# Altium PCB STM32ComputeModulePCB.PCBDOC
Units mil, origin at the board's own origin, x right, y up, seen from the top; angles counter-clockwise.
Board outline 2661.42 x 1181.1 mil, 2 copper layers (TopLayer, BottomLayer), stack 38.4 mil thick; 31 components, 119 nets, 379 pads, 65 vias.
Unrouted connection lines stored in the file: 33.
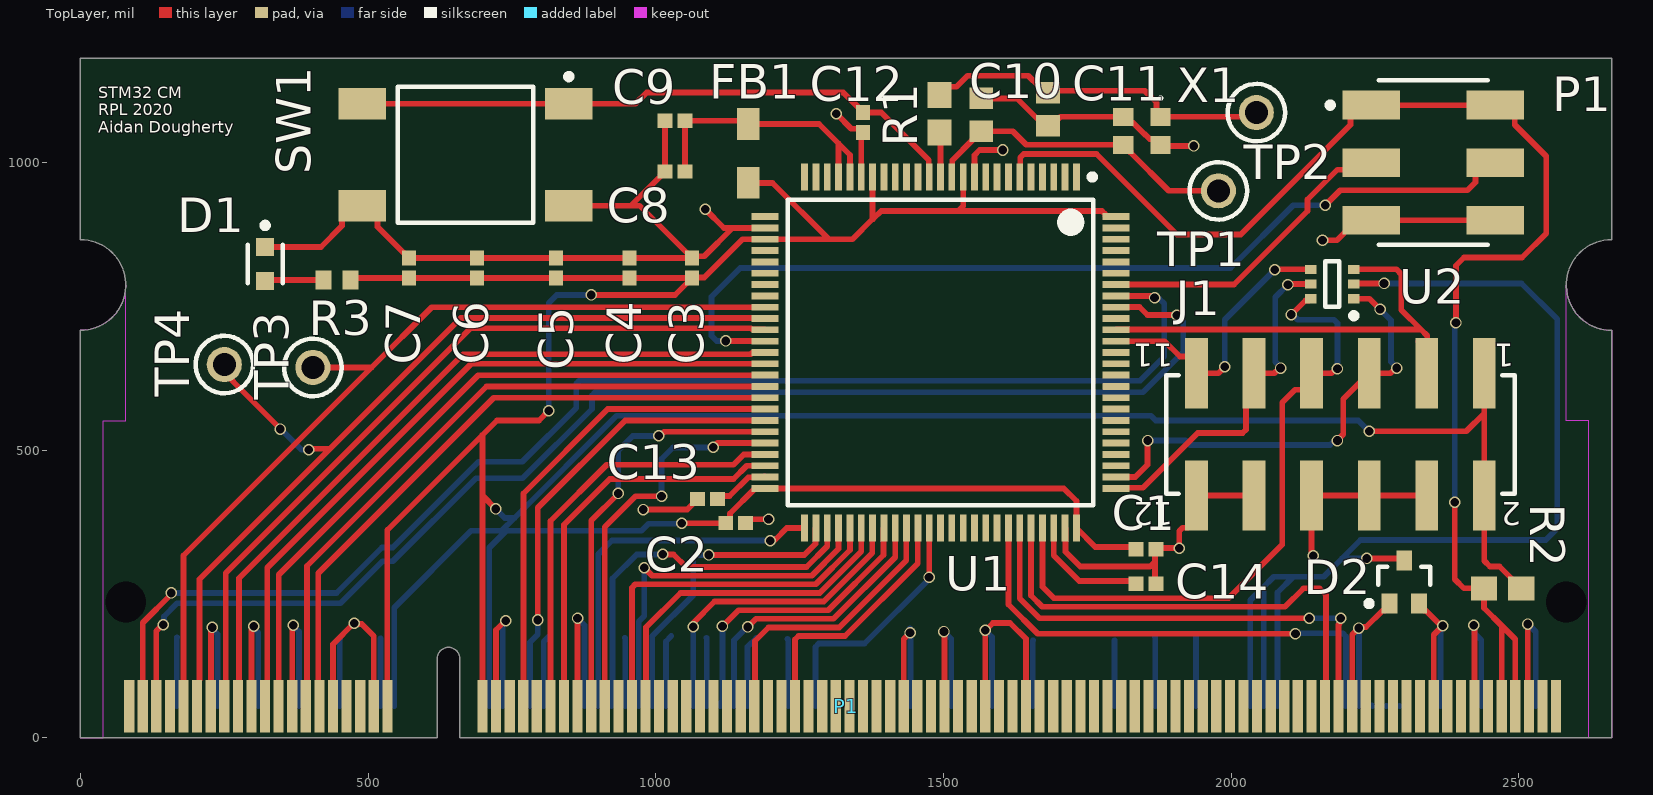
[diagram p0: TopLayer view]
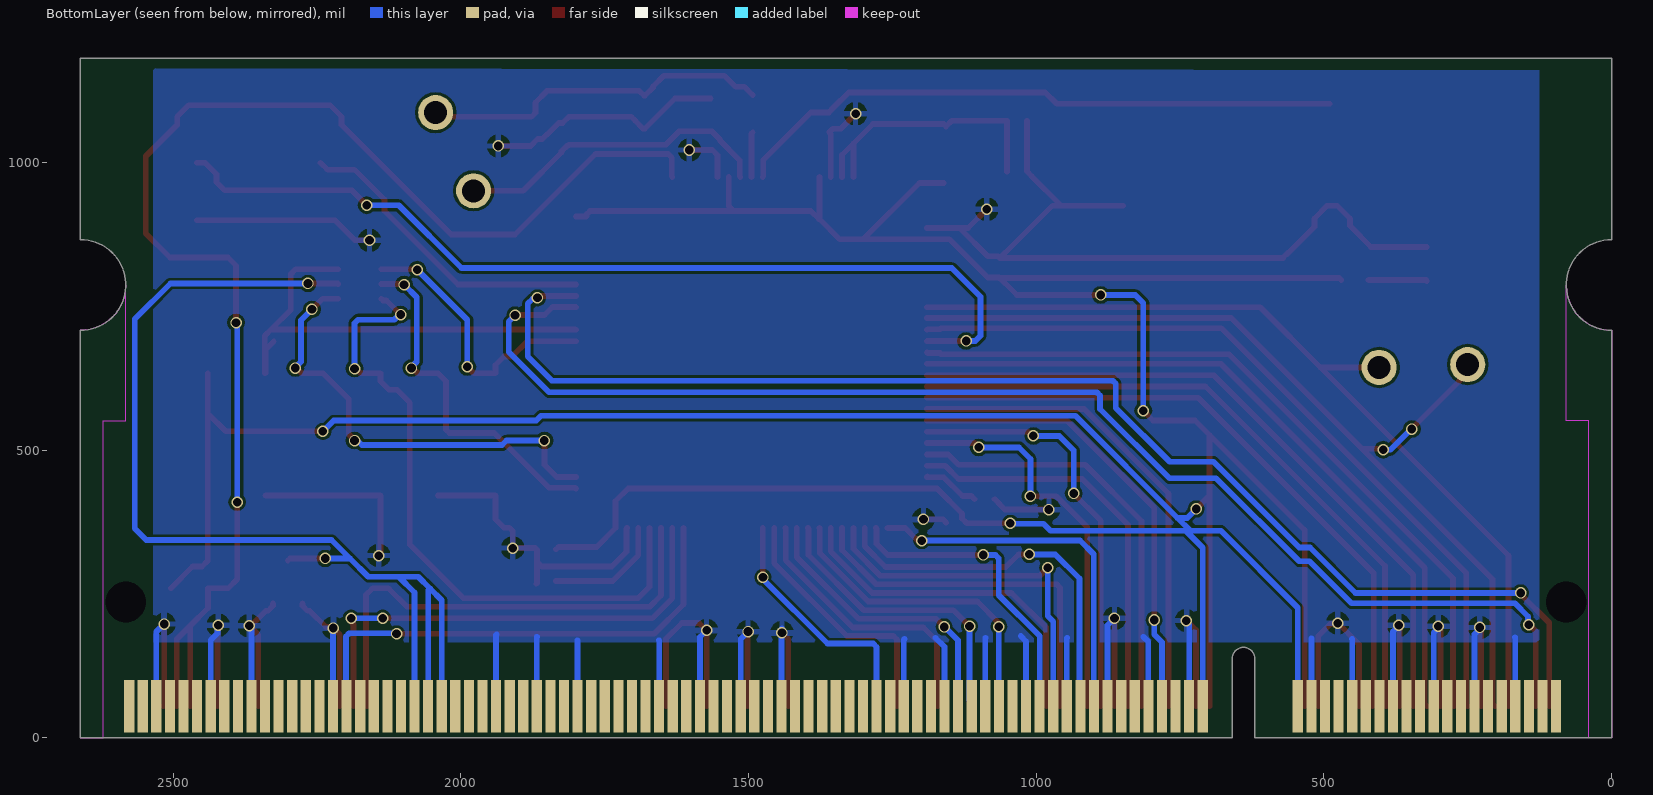
[diagram p1: BottomLayer view, seen from below]

## Layer stack, top to bottom
TopSolder: solder mask 0.4, Solder Resist, Dk 3.5
TopLayer: signal copper 0.7
Dielectric2: prepreg 37, FR-4, Dk 4.8
BottomLayer: signal copper 0.7
BottomSolder: solder mask 0.4, Solder Resist, Dk 3.5

## Board outline
0,0 0,708.66 ccw(c0,787.4) 0,866.14 0,1181.1 2661.42,1181.1 2661.42,866.14 ccw(c2661.42,787.4) 2661.42,708.66 2661.42,0 659.45,0 659.45,137.8 ccw(c639.76,137.8) 620.08,137.8 620.08,0

## Design rules (kind name [scope] priority, off if disabled: settings)
Clearance Clearance_EdgeConnector [InComponentClass('Edge Connector') vs InComponentClass('Edge Connector')] p1: gap=5.91 ignorepadtopadclearanceinfootprint=FALSE except(0: Arc-Hole Track-Hole SMDPad-Hole THPad-Hole Via-Hole Fill-Hole Poly-Hole Region-Hole Text-Hole)
Clearance [All] p2: gap=5 ignorepadtopadclearanceinfootprint=FALSE except(1: Via-Via Via-Hole)
FabricationTestPointUsage TestPointUsage [All] p1: valid=0 allowmultiple=FALSE
FabricationTestpoint Testpoint [All] p1: side=3 testpointundercomponent=TRUE minsize=40 maxsize=100 preferedsize=60 minholesize=20 maxholesize=40 preferedholesize=32 testpointgrid=1 allowsidetop=TRUE allowsidebottom=TRUE usegrid=TRUE gridtolerance=0.01
Height "MO-224 Page 3, \"Component Height Constraint\"" [TouchesRoom('JEDEC Component Area Front') Or TouchesRoom('JEDEC Component Area Back')] p1: minheight=0 maxheight=55.12 prefheight=55.12
PlaneClearance [All] p1: clearance=19.68
PolygonConnect [All] p1: connectstyle=Relief reliefconductorwidth=10 reliefentries=4 polygonreliefangle="90 Angle" airgapwidth=10
RoutingVias [All] p1: holewidth=15 width=20 viastyle="Through Hole" minholewidth=7 minwidth=10 maxholewidth=15 maxwidth=20
SilkToSolderMaskClearance SilkscreenOverComponentPads [IsPad] p1: minsilkscreentomaskgap=10 clearancetoexposedcopper=TRUE
SolderMaskExpansion [All] p1: expansion=4 istentingtop=FALSE
Width [All] p1: maxlimit=10 minlimit=10 preferedwidth=10
25 further rules are at their usual default settings.

## Classes and differential pairs
net class HDMI_DP[0..2]: HDMI_DP0 HDMI_DP1 HDMI_DP2
net class HDMI_DN[0..2]: HDMI_DN0 HDMI_DN1 HDMI_DN2
net class GPIO[0..45]: GPIO0 GPIO1 GPIO2 GPIO3 GPIO4 GPIO5 GPIO6 GPIO7 GPIO8 GPIO9 GPIO10 GPIO11 GPIO12 GPIO13 GPIO14 GPIO15 GPIO16 GPIO17 GPIO18 GPIO19 GPIO20 GPIO21 GPIO22 GPIO23 GPIO24 GPIO25 GPIO26 GPIO27 GPIO28 GPIO29 GPIO30 GPIO31 GPIO32 GPIO33 GPIO34 GPIO35 GPIO36 GPIO37 GPIO38 GPIO39 GPIO40 GPIO41 GPIO42 GPIO43 GPIO44 GPIO45
net class DSI1_DP[0..3]: DSI1_DP0 DSI1_DP1 DSI1_DP2 DSI1_DP3
net class DSI1_DN[0..3]: DSI1_DN0 DSI1_DN1 DSI1_DN2 DSI1_DN3
net class DSI0_DP[0..1]: DSI0_DP0 DSI0_DP1
net class DSI0_DN[0..1]: DSI0_DN0 DSI0_DN1
net class CAM1_DP[0..3]: CAM1_DP0 CAM1_DP1 CAM1_DP2 CAM1_DP3
net class CAM1_DN[0..3]: CAM1_DN0 CAM1_DN1 CAM1_DN2 CAM1_DN3
net class CAM0_DP[0..1]: CAM0_DP0 CAM0_DP1
net class CAM0_DN[0..1]: CAM0_DN0 CAM0_DN1
component class U_CON_SODIMM_200PIN_MO-224_NEW.SchDoc: P1

## Components (designator, comment, footprint, x,y, rotation, side; value= is the part's Value field where it differs from the comment)
C1 "100nF 0402" CAPC1005X55X25NL05T10 1852,328 r0 top
C2 "100nF 0402" CAPC1005X55X25NL05T10 1139,374 r0 top
C3 "100nF 0402" CAPC1005X55X25NL05T10 1062.99,816.93 r90 top
C4 "100nF 0402" CAPC1005X55X25NL05T10 954.72,816.93 r90 top
C5 "100nF 0402" CAPC1005X55X25NL05T10 826.77,816.93 r90 top
C6 "100nF 0402 x6" CAPC1005X55X25NL05T10 688.98,816.93 r90 top
C7 "4.7uF 0402" CAPC1005X55X25NL05T10 570.87,816.93 r90 top
C8 "10nF 0402" CAPC1005X55X25NL05T10 1033.46,984.25 r0 top
C9 "1uF 0402" CAPC1005X55X25NL05T10 1033.46,1072.83 r0 top
C10 "22pF 0603" CAPC1608X90X35ML10T15 1566,1083 r90 top
C11 "22pF 0603" CAPC1608X90X35ML10T15 1682,1093 r90 top
C12 "0.1pF 0402" CAPC1005X55X25NL05T10 1360,1070 r90 top
C13 "2.2uF 0402" CAPC1005X55X25NL05T10 1090,415 r0 top
C14 "2.2uF 0402" CAPC1005X55X25NL05T10 1852,268 r180 top
D1 "HSMG-C191" FP-HSMG-C191-MFG 321,824 r270 top
D2 "SP1001-02JTG" LFUS-SC70-3_V 2301,271 r90 top
FB1 "BLM21AG102SN1D" MURA-BLM21-H1-CHIP-2_V 1161,1016 r90 top
J1 "61031221121" 61031221121 2190,527.7 r180 top
P1 "95278-101A06LF" AMPM-95278-101A06LF_V 2351.48,1000 r270 top
P1 "SODIMM-CN-2P-M-R200" SODIMM-GF-2D-600-1K-S200 84.65,55.12 r0 top locked
R1 "0R 0603" RESC1609X55X30ML10T20 1493,1085 r90 top
R2 "0R 0603" RESC1609X55X30ML10T20 2472,260 r180 top
R3 "CRCW0603120RFKEA" RESC1609X50X30LL8T20 446,796 r180 top
SW1 "4-1437565-1" TECO-4-1437565-1_V 669.29,1013.78 r270 top
TP1 "5004" KSTN-5004 1978,951 r0 top
TP2 "5004" KSTN-5004 2044,1087 r0 top
TP3 "5004" KSTN-5004 404,644 r0 top
TP4 "5004" KSTN-5004 250,649 r0 top
U1 "STM32F427VI" STM-LQFP100_V 1495,670 r270 top
U2 "SMF05CT1G" ONSC-SC70-6-419B-02_W_V 2176,789 r180 top
X1 "ABM10-16.000MHZ-E20-T" ABRA-ABM10_V 1845,1055 r270 top

## Footprints (in the part's own frame and the unit in brackets; to place one, negate y for a bottom-side part, rotate by r counter-clockwise, add the part's x,y. Pads: shape width x height; smd on the part's side, far side on the other; paste and mask are expansions set on the pad)
61031221121 [mm] "Pin Header, pitch 2.54 mm, SMD, Vertical, dual row, 12p"
  rect 1x3.1 smd: 1(-6.35,-2.7) 2(-6.35,2.7) 3(-3.81,-2.7) 4(-3.81,2.7) 5(-1.27,-2.7) 6(-1.27,2.7) 7(1.27,-2.7) 8(1.27,2.7) 9(3.81,-2.7) 10(3.81,2.7) 11(6.35,-2.7) 12(6.35,2.7)
  silkscreen extent -7.7,-2.62 7.7,2.62, body extent -7.62,-3.75 7.62,3.75, height 9.62
ABRA-ABM10_V [mm] "SMD, 4-Leads, Body 2x2.5mm, Pitch 1.65mm"
  rect 0.8x0.9 smd: 1(-0.625,0.825) 2(-0.625,-0.825) 3(0.625,-0.825) 4(0.625,0.825)
  silkscreen extent -1.51,0.76 -1.39,0.89, body extent -1,-1.25 1,1.25, height 0.7
AMPM-95278-101A06LF_V [mm] "SMD, 6-Leads, Body 7.26x4.83mm, Pitch 2.54mm"
  rect 1.27x2.54 smd: 1(-2.54,-2.73) 2(-2.54,2.73) 3(0,-2.73) 4(0,2.73) 5(2.54,-2.73) 6(2.54,2.73)
  silkscreen extent -3.63,-4.67 3.63,2.41, body extent -3.61,-3.64 3.61,3.64, height 9.71
CAPC1005X55X25NL05T10 [mm] "Chip Capacitor, 2-Leads, Body 1.00x0.50mm, IPC Medium Density"
  rect 0.66x0.62 smd: 1(-0.44,0) 2(0.44,0)
  body extent -0.53,-0.28 0.53,0.27, height 0.55
CAPC1608X90X35ML10T15 [mm] "Chip Capacitor, 2-Leads, Body 1.7x0.9mm, IPC Low Density"
  rect 0.95x1.05 smd: 1(-0.725,0) 2(0.725,0)
  body extent -0.85,-0.45 0.85,0.45, height 0.9
FP-HSMG-C191-MFG [mm]
  rect 0.8x0.8 smd paste+0 mask+0: 1(-0.75,0) 2(0.75,0)
  silkscreen extent -1.82,-0.77 0.85,0.77, body extent -1.25,-0.55 1.25,0.55, height 0.25
KSTN-5004 [mm] "Test Point, Through Hole, Dia 2.54mm"
  round 1.55 hole 1.016: 1(0,0)
  silkscreen extent -1.27,-1.27 1.27,1.27, body extent -1.27,-1.27 1.27,1.27, height 4.57
LFUS-SC70-3_V [mm] "SOT23, 3-Leads, Body 2.25x1.35mm, Pitch 0.65mm"
  rect 0.9x0.7 smd: 1(-0.95,0.65) 2(-0.95,-0.65) 3(0.95,0)
  silkscreen extent -1.07,-1.15 0.67,1.67, body extent -1.2,-1.12 1.2,1.12, height 1.1
MURA-BLM21-H1-CHIP-2_V [mm] "Chip Ferrite Bead, 2-Leads, Body 2x1.25mm, Height 1.05mm"
  rect 1.4x1 smd: 1(-1.3,0) 2(1.3,0)
  body extent -1,-0.63 1,0.63, height 1.05
ONSC-SC70-6-419B-02_W_V [mm] "SOT23, 6-Leads, Body 2x1.25mm, Pitch 0.65mm"
  rect 0.5x0.4 smd: 1(-0.95,0.65) 2(-0.95,0) 3(-0.95,-0.65) 4(0.95,-0.65) 5(0.95,0) 6(0.95,0.65)
  silkscreen extent -1.08,-1 0.3,1.52, body extent -0.63,-1 0.63,1, height 1.1
RESC1609X50X30LL8T20 [mm] "Chip Resistor, 2-Leads, Body 1.65x0.95mm, IPC High Density"
  rect 0.7x0.85 smd: 1(-0.6,0) 2(0.6,0)
  body extent -0.82,-0.48 0.82,0.48, height 0.5
RESC1609X55X30ML10T20 [mm] "Chip Resistor, 2-Leads, Body 1.60x0.85mm, IPC Low Density"
  rect 1.15x1.05 smd: 1(-0.825,0) 2(0.825,0)
  body extent -0.85,-0.48 0.85,0.48, height 0.55
SODIMM-GF-2D-600-1K-S200 [mm] "Golden finger, SODIMM, Dual, Staggered, Pitch 0.6mm, 200-Position"
  rect 0.45x2.3 smd paste-0.75 mask+0.3: 1(0,0) 3(0.6,0) 5(1.2,0) 7(1.8,0) 9(2.4,0) 11(3,0) 13(3.6,0) 15(4.2,0) 17(4.8,0) 19(5.4,0) 21(6,0) 23(6.6,0) 25(7.2,0) 27(7.8,0) 29(8.4,0) 31(9,0) 33(9.6,0) 35(10.2,0) 37(10.8,0) 39(11.4,0) 41(15.6,0) 43(16.2,0) 45(16.8,0) 47(17.4,0) 49(18,0) 51(18.6,0) 53(19.2,0) 55(19.8,0) 57(20.4,0) 59(21,0) 61(21.6,0) 63(22.2,0) 65(22.8,0) 67(23.4,0) 69(24,0) 71(24.6,0) 73(25.2,0) 75(25.8,0) 77(26.4,0) 79(27,0) 81(27.6,0) 83(28.2,0) 85(28.8,0) 87(29.4,0) 89(30,0) 91(30.6,0) 93(31.2,0) 95(31.8,0) 97(32.4,0) 99(33,0) 101(33.6,0) 103(34.2,0) 105(34.8,0) 107(35.4,0) 109(36,0) 111(36.6,0) 113(37.2,0) 115(37.8,0) 117(38.4,0) 119(39,0) 121(39.6,0) 123(40.2,0) 125(40.8,0) 127(41.4,0) 129(42,0) 131(42.6,0) 133(43.2,0) 135(43.8,0) 137(44.4,0) 139(45,0) 141(45.6,0) 143(46.2,0) 145(46.8,0) 147(47.4,0) 149(48,0) 151(48.6,0) 153(49.2,0) 155(49.8,0) 157(50.4,0) 159(51,0) 161(51.6,0) 163(52.2,0) 165(52.8,0) 167(53.4,0) 169(54,0) 171(54.6,0) 173(55.2,0) 175(55.8,0) 177(56.4,0) 179(57,0) 181(57.6,0) 183(58.2,0) 185(58.8,0) 187(59.4,0) 189(60,0) 191(60.6,0) 193(61.2,0) 195(61.8,0) 197(62.4,0) 199(63,0)
  rect 0.45x2.3 smd far side paste-0.75 mask+0.3: 2(0.3,0) 4(0.9,0) 6(1.5,0) 8(2.1,0) 10(2.7,0) 12(3.3,0) 14(3.9,0) 16(4.5,0) 18(5.1,0) 20(5.7,0) 22(6.3,0) 24(6.9,0) 26(7.5,0) 28(8.1,0) 30(8.7,0) 32(9.3,0) 34(9.9,0) 36(10.5,0) 38(11.1,0) 40(11.7,0) 42(15.9,0) 44(16.5,0) 46(17.1,0) 48(17.7,0) 50(18.3,0) 52(18.9,0) 54(19.5,0) 56(20.1,0) 58(20.7,0) 60(21.3,0) 62(21.9,0) 64(22.5,0) 66(23.1,0) 68(23.7,0) 70(24.3,0) 72(24.9,0) 74(25.5,0) 76(26.1,0) 78(26.7,0) 80(27.3,0) 82(27.9,0) 84(28.5,0) 86(29.1,0) 88(29.7,0) 90(30.3,0) 92(30.9,0) 94(31.5,0) 96(32.1,0) 98(32.7,0) 100(33.3,0) 102(33.9,0) 104(34.5,0) 106(35.1,0) 108(35.7,0) 110(36.3,0) 112(36.9,0) 114(37.5,0) 116(38.1,0) 118(38.7,0) 120(39.3,0) 122(39.9,0) 124(40.5,0) 126(41.1,0) 128(41.7,0) 130(42.3,0) 132(42.9,0) 134(43.5,0) 136(44.1,0) 138(44.7,0) 140(45.3,0) 142(45.9,0) 144(46.5,0) 146(47.1,0) 148(47.7,0) 150(48.3,0) 152(48.9,0) 154(49.5,0) 156(50.1,0) 158(50.7,0) 160(51.3,0) 162(51.9,0) 164(52.5,0) 166(53.1,0) 168(53.7,0) 170(54.3,0) 172(54.9,0) 174(55.5,0) 176(56.1,0) 178(56.7,0) 180(57.3,0) 182(57.9,0) 184(58.5,0) 186(59.1,0) 188(59.7,0) 190(60.3,0) 192(60.9,0) 194(61.5,0) 196(62.1,0) 198(62.7,0) 200(63.3,0)
STM-LQFP100_V [mm] "Thin QFP, 100-Leads, Body 14x14mm, Pitch 0.5mm, ST Recommended"
  rect 1.2x0.3 smd: 1(-7.75,6) 2(-7.75,5.5) 3(-7.75,5) 4(-7.75,4.5) 5(-7.75,4) 6(-7.75,3.5) 7(-7.75,3) 8(-7.75,2.5) 9(-7.75,2) 10(-7.75,1.5) 11(-7.75,1) 12(-7.75,0.5) 13(-7.75,0) 14(-7.75,-0.5) 15(-7.75,-1) 16(-7.75,-1.5) 17(-7.75,-2) 18(-7.75,-2.5) 19(-7.75,-3) 20(-7.75,-3.5) 21(-7.75,-4) 22(-7.75,-4.5) 23(-7.75,-5) 24(-7.75,-5.5) 25(-7.75,-6) 51(7.75,-6) 52(7.75,-5.5) 53(7.75,-5) 54(7.75,-4.5) 55(7.75,-4) 56(7.75,-3.5) 57(7.75,-3) 58(7.75,-2.5) 59(7.75,-2) 60(7.75,-1.5) 61(7.75,-1) 62(7.75,-0.5) 63(7.75,0) 64(7.75,0.5) 65(7.75,1) 66(7.75,1.5) 67(7.75,2) 68(7.75,2.5) 69(7.75,3) 70(7.75,3.5) 71(7.75,4) 72(7.75,4.5) 73(7.75,5) 74(7.75,5.5) 75(7.75,6)
  rect 0.3x1.2 smd: 26(-6,-7.75) 27(-5.5,-7.75) 28(-5,-7.75) 29(-4.5,-7.75) 30(-4,-7.75) 31(-3.5,-7.75) 32(-3,-7.75) 33(-2.5,-7.75) 34(-2,-7.75) 35(-1.5,-7.75) 36(-1,-7.75) 37(-0.5,-7.75) 38(0,-7.75) 39(0.5,-7.75) 40(1,-7.75) 41(1.5,-7.75) 42(2,-7.75) 43(2.5,-7.75) 44(3,-7.75) 45(3.5,-7.75) 46(4,-7.75) 47(4.5,-7.75) 48(5,-7.75) 49(5.5,-7.75) 50(6,-7.75) 76(6,7.75) 77(5.5,7.75) 78(5,7.75) 79(4.5,7.75) 80(4,7.75) 81(3.5,7.75) 82(3,7.75) 83(2.5,7.75) 84(2,7.75) 85(1.5,7.75) 86(1,7.75) 87(0.5,7.75) 88(0,7.75) 89(-0.5,7.75) 90(-1,7.75) 91(-1.5,7.75) 92(-2,7.75) 93(-2.5,7.75) 94(-3,7.75) 95(-3.5,7.75) 96(-4,7.75) 97(-4.5,7.75) 98(-5,7.75) 99(-5.5,7.75) 100(-6,7.75)
  silkscreen extent -7.87,-6.75 6.75,6.83, body extent -7,-7 7,7, height 1.6
TECO-4-1437565-1_V [mil] "SMD, 4-Leads, Body 6x6mm, Pitch 9.1mm"
  rect 55x83 smd: 1(-88.5,179.5) 2(-88.5,-179.5) 3(88.5,179.5) 4(88.5,-179.5)
  silkscreen extent -141,-118 118,184, body extent -118,-197 118,197, height 200

## Part data
C1 C2 C3 C4 C5 C6 C7 C8 C9 C12 C13 C14: library part CMP-2008-04549-1, Manufacturer=Murata, Part Number=GRM155R60J475ME47D
C10 C11: library part CMP-2000-04945-1, "Chip Capacitor, 22 pF, +/- 5%, 50 V, -55 to 125 degC, 0603 (1608 Metric), RoHS, Tape and Reel", Capacitance=22pF, Case Size/Dimension=0603, Dielectric=C0G, Manufacturer=Murata, Package Description="2-Pin Surface Mount Device, Body 1.6 x 0.8 mm", Package Reference=603, Rated Voltage=50V, Tolerance (%)=±5%, Datasheet URL=https://datasheet.ciiva.com/11786/0900766b807a1cab-11786398.pdf, Datasheet Version=Jul-06, Manufacturer URL=http://www.murata.com/
D1: library part CMP-18399-000001-1, "LED GREEN DIFFUSED CHIP SMD", Colour=Green, Forward Current=20mA, Forward Voltage=2.2V, Manufacturer=Broadcom, Max Junction Temp=+95°C, Package=0, Power Dissipation=52mW, Reverse Voltage=5V, Temperature="-40°C to +85°C", Temperature Range High=+85°C, Temperature Range Low=-40°C, Automotive=No, Category=Diode, ComponentLink2Description=Datasheet, ComponentLink2URL=https://docs.broadcom.com/docs/AV02-0551EN, Device Class L1=Optoelectronics, Device Class L2=LEDs, Device Class L3=unset, Digikey Description="LED GREEN DIFFUSED CHIP SMD", Footprint 0 Description="SM LED; 2 Flat Leads", Height=0.7mm, Ipc Land Pattern Name=DIOC16080X45, Lead Free=Yes, Led Orientation="Top View", Luminous Intensity=15mcd, Manufacturer Part Number=HSMG-C191, Mouser Description="LED Uni-Color Green 570nm 2-Pin Chip LED T/R", Octopart=https://octopart.com/hsmg-c191-broadcom-71131308, Peak Emmision Wavelength=570nm, RoHS=TRUE, Viewing Angle=170°, Wavelength=572nm
D2: library part CMP-2000-07134-1, "TVS Diode Array, 0.7 to 1.2 V, -40 to 125 degC, 3-Pin SOT23 (SC70), RoHS, Tape and Reel", Capacitance=8pF, Clamping Voltage-Max=13V, Manufacturer=Littelfuse, Operating Temp Range=-40to+85°C, Package Description="3-Pin Small Outline Transistor, Body 2.05 x 1.25 mm, Pitch 0.65 mm", Package Reference=SC70-3, Datasheet URL=http://www.littelfuse.com/~/media/electronics/datasheets/tvs_diode_arrays/littelfuse_tvs_diode_array_sp1001_datasheet.pdf.pdf, Datasheet Version=01/2016, Directional=Uni-Directional, Manufacturer URL=http://www.littelfuse.com/, Mounting Technology=SurfaceMount, No of Channels=2
FB1: library part CMP-0686-00665-2, "Chip Ferrite Bead for General Signal lines, 1000 Ohm, 500 mA, -55 to 125 degC, 2 x 1.25 x 1.05 mm SMD, Tape and Reel", DC Resistance="0.28 Ohm Max.", Manufacturer=Murata, Operating Temperature Range="-55 to 125 degC", Rated Current="500 mA", ComponentLink1Description="Manufacturer URL", ComponentLink1URL=http://www.murata.com/, ComponentLink2Description=Datasheet, ComponentLink2URL=http://www.murata.com/products/catalog/pdf/c31e.pdf, ComponentLink3Description="Package Specification", ComponentLink3URL=http://www.murata.com/products/catalog/pdf/c31e.pdf, DatasheetVersion=08/2013, Impedance (at 100 MHz)="1000 Ohm +/- 25%", Mounting Technology="Surface Mount", PackageDescription="2-Pin Chip, Body 2 x 1.25 mm", PackageReference=BLM21_H1050-2, Packing="Tape and Reel", PartNumber=BLM21AG102SN1D
J1: library part CMP-1502-01054-1, "SMT Vertical Pin Header WR-PHD, Pitch 2.54 mm, Dual Row, 12 pins", Contact Resistance=20mOhm, Manufacturer="Wurth Elektronik", Operating Temperature=-40to125degC, Rated Current=3A, Withstanding Voltage=500VAC, Working Voltage=250VAC, Datasheet URL=https://katalog.we-online.de/em/datasheet/6103xx21121.pdf, Gender=Male, Manufacturer URL=http://www.we-online.de, Mounting Technology=SMT, Orientation=Vertical, Package Reference=61031221121, Packaging=TapeandReel, Part Number=61031221121, Pin Number=12, Pitch=2.54mm, Publisher=WurthElektronik, Row Number=Dual
P1: library part CMP-1743-00002-1, "Male Header, Pitch 2.54 mm, 2 x 3 Position, Height 14.4 mm, RoHS, Tape and Reel", Case Code (Imperial)=0603, Case Code (Metric)=1608, Max Operating Temperature="155 degC", Min Operating Temperature="-55 degC", Power Rating="100 mW", Resistance="49.9 Ohm", Tolerance=1%, Voltage Rating="50 V", Case\Package=0603, ComponentLink1Description=Datasheet, ComponentLink1URL=http://portal.fciconnect.com/Comergent//fci/drawing/95278.pdf, DatasheetVersion="Rev. AC, 03/2016", Height="0.45 mm", Length="1.6 mm", Mount="Surface Mount", PackageDescription="Male Header, Pitch 2.54 mm, 2 x 3 Position, Height 14.4 mm", PackageReference=95278-101A06LF, Packaging="Tape and Reel", REACH SVHC="No SVHC", RoHSCompliant=true, Width="0.8 mm"
P1: library part CMP-0001-00060-2, "Golden finger, SODIMM, Dual, Staggered, Pitch 0.6mm, 200-Position", Package Reference=SODIMM-GF-2D-600-1K-S200, ClassName="Edge Connector", Mating Connector=Tyco-6-1473005-1, Publisher=Altium
R1 R2: library part CMP-2000-03816-1, Manufacturer="Vishay Dale", Part Number=CRCW06030000Z0EA
R3: library part CMP-1666-00020-2, "Chip Resistor, 120 Ohm, +/- 1%, 100 mW, -55 to 155 degC, 0603 (1608 Metric), RoHS, Tape and Reel", Case Code (Imperial)=0603, Case Code (Metric)=1608, Colour=Blue, Forward Current="10 mA", Forward Voltage="3.9 V", Max Operating Temperature="100 degC", Min Operating Temperature="-40 degC", Package Quantity=3000, Power Rating="68 mW", Case\Package=0603, ComponentLink1Description="Manufacturer URL", ComponentLink1URL=http://www.vishay.com/, ComponentLink2Description=Datasheet, ComponentLink2URL=http://www.farnell.com/datasheets/1533075.pdf, DatasheetVersion=Nov-10, Height="0.6 mm", Illumination Colour=Blue, Length="1.6 mm", Lens Style=Diffused, Luminous Intensity="5 mcd", Mount="Surface Mount", Nominal Vf="3.9 V", Nominal Wavelength="466 nm", PackageDescription="2-Pin Surface Mount Device, Body 1.575 x 0.85 mm", PackageReference=0603, Packaging="Tape and Reel", Pins=2, Radiation Hardening=No, REACH SVHC="No SVHC", RoHSCompliant=true, Viewing Angle="160 degrees", Width="0.8 mm"
SW1: library part CMP-2000-05602-1, "Tactile Switch, 50 mA, 12 VDC, -20 to 85 degC, 4-Pin SMD, RoHS, Bulk", Actuator Color=N/A, Contact Rating @ Voltage=0.05@12VDCA, Dielectric Strength=500VAC, Manufacturer=TEConnectivity/AMPBrand, Maximum Contact Resistance=100mOhm, Maximum DC Voltage Rating=12V, Minimum Insulation Resistance=100MOhm, Operating Force=1.57N, Operating Temperature=-20to85C, Package Description="4-Pin Surface Mount Device, Body 6 x 6 mm, Pitch 9.1 mm", Actuator Length=1.4mm, Actuator Style=RoundButton, Base Material=N/A, Body Orientation=Straight, Contact Material=CopperAlloy, Contact Plating=Silver, Datasheet URL=https://datasheet.ciiva.com/14635/0900766b80912216-14635826.pdf, Datasheet Version=04/2007, Dimension=6x10x5.25mm, Electrical Life=100000Cycle, Family=FSMJSMA, Ground Terminal=No, Housing Material=N/A, Illumination Type=N/R, Manufacturer URL=http://www.te.com/, Maximum AC Voltage Rating=N/A, Mechanical Life=N/A, Mounting=SurfaceMount,GullWing, Mounting Technology=SurfaceMount, Package Reference=4-1437565-1, Packaging=Bulk, Part No=4-1437565-1, Pole Throw Configuration=N/A, Product Weight=N/A, RoHS=Yes, Seal Description=N/A, Seal Location=N/A, Switch Configuration=N/A, Type=N/A
TP1 TP2 TP3 TP4: library part CMP-2000-05575-1, "Test Point, Yellow, 1-Pin THD, RoHS, Bulk", Manufacturer=Keystone, Package Description="1-Pin Through Hole Device, Dia 2.54 mm", Datasheet URL=http://www.keyelco.com/product-pdf.cfm?p=1313, Datasheet Version="Rev. G, 12/2008", Manufacturer URL=http://www.keyelco.com/, Mounting Technology=ThroughHole, Package Reference=5004
U1: library part CMP-0237-00070-3, "ARM Cortex-M3 32-bit MCU, 512 KB Flash, 128 KB Internal RAM, 82 I/Os, 100-pin LQFP, -40 to 85 degC, Tray", I/Os (High Current)=82, Operating Frequency(F) (Processor speed) (MHz)=120, PartNumber=STM32F207VET6, Supply Voltage(Vcc) min (V)=1.8, ComponentLink1Description="Manufacturer URL", ComponentLink1URL=http://www.st.com/web/en/home.html, ComponentLink2Description=Datasheet, ComponentLink2URL=http://www.st.com/st-web-ui/static/active/en/resource/technical/document/datasheet/CD00237391.pdf, ComponentLink3Description="Package Specification", ComponentLink3URL=http://www.st.com/st-web-ui/static/active/en/resource/technical/document/data_brief/DM00071938.pdf, Core="ARM Cortex-M3", D/A Converter="2x12-bit (2 Channel)", DatasheetVersion="Rev. 9", FLASH Size (Prog) (kB)=512, Internal RAM Size (kB)=128, Mounting Technology="Surface Mount", PackageDescription="100-Pin Low Profile Quad Flat Package, 14 x 14 mm Body, 0.5 mm Pitch", PackageReference=LQFP100, PackageVersion="Rev. 1, 06/2013", Packing=Tray
U2: library part CMP-1061-00155-1, "5-Line Transient Voltage Suppressor Array, 6-Pin SC70, Pb-Free, Tape and Reel", Manufacturer="On Semiconductor", ComponentLink1Description="Manufacturer URL", ComponentLink1URL=http://www.onsemi.com/, ComponentLink2Description=Datasheet, ComponentLink2URL=http://www.onsemi.com/pub_link/Collateral/SMF05C-D.PDF, ComponentLink3Description="Package Specification", ComponentLink3URL=http://www.onsemi.com/pub_link/Collateral/SMF05C-D.PDF, DatasheetVersion="Rev. 4", Direction=Unidirectional, IR Max (uA)=5, Mounting Technology="Surface Mount", PackageDescription="6-Pin Small Outline Transistor, Body 2 x 1.25 mm, Pitch 0.65 mm", PackageReference=SC70-6-419B-02_W, PackageVersion="Rev. W", Packing="Tape and Reel", PartNumber=SMF05CT1G, PPK Max (W)=100, RoHS=Pb-Free
X1: library part CMP-2000-05727-1, "Ceramic SMD Ultra Miniature Quartz Crystal, 25 MHz, 100 Ohm, 10 pF, -40 to 85 degC, 4-Pin SMD, RoHS, Tape and Reel", Case Height=0.5mm, Case Length=2.5mm, Case Width=2mm, Frequency=25MHz, Frequency Stability=30PPM, Load Capacitance=10pF, Manufacturer=ABRACON, Operating Temperature Range=-40Cto+85C, Package / Case=2.5mmx2mmx0.5mm, Package Description="4-Pin Surface Mount Device, Body 2 x 2.5 mm, Pitch 1.65 mm", Package Reference=ABM10, Tolerance=20PPM, Brand=ABRACON, Datasheet URL=https://datasheet.ciiva.com/4946/abm10-31166-4946144.pdf, Datasheet Version=01/2013, Dimensions=2mmWx2.5mmLx0.5mmH, Esr=100Ohms, Factory Pack Quantity=3000, Manufacturer URL=http://www.abracon.com/, Mounting Style=SMD/SMT, Mounting Technology=SurfaceMount, Packaging=Reel, Product Category=Crystals, RoHS=Details, Series=ABM10, Termination Style=SMD/SMT, Type=UltraMiniatureQuartzCrystal

## Free pads (board coordinates)
  round 59.06 hole 70.87 unplated: MH1(78.74,236.22) MH2(2582.68,236.22)

## Via types
v1: diameter 20, hole 15, TopLayer to BottomLayer, 65 vias

## Nets (pads, with @x,y where several pads share a name; then routed paths per layer and width w, separated by ;. In a path a pad name is that pad's centre, name@x,y a point inside that pad or via, vN(x,y) a via of type N, cw(c..) or ccw(c..) an arc to the next point about the centre after c; other vN are vias at no path point)
1V8: P1.183 P1.184 P1.185 P1.186
3V3: P1.1@2244,1100 P1.2@2458.96,1100 P1.191 P1.192 P1.193 P1.194 R2.2 U1.6 | length 2440.3
  TopLayer w10: U1.6 1633.7,976.02 1633.7,1009.14 1639.56,1015 1766,1015 1906,875 2017,875 2207.86,1065.86 2207.86,1080 2227.86,1100 2244,1100 2458.96,1100 2473.1,1100 2493.1,1080 2493.1,1065.86 2548,1010.96 2548,877 2506,835 2405,835 2391,821 v1(2391,722) ; v1(2389,410) 2389,276 2405,260 R2.2 2439.52,225.95 2470.47,195 ; P1.191 2470.47,195 ; P1.193 2494.09,171.38 2470.47,195
  BottomLayer w10: v1(2389,410) 2389,712.93 2389.09,713.02 2389.09,720.09 v1(2391,722)
BOOT0: P1.3@2244,1000 U1.94 | length 543.5
  TopLayer w10: U1.94 1800.23,788 2005,788 2133,916 2133,936 2184.86,987.86 2231.86,987.86 P1.3@2244,1000
BOOT1: P1.4@2458.96,1000 U1.37 | length 1631.5
  TopLayer w10: v1(1122,690) 1189.57,690 U1.37 ; v1(2163.7,926) 2189.7,952 2410.96,952 2424.82,965.86 2424.82,980 2444.82,1000 P1.4@2458.96,1000
  BottomLayer w10: v1(1122,690) 1106,690 1097,699 1097,767 1147,817 1999,817 2108,926 v1(2163.7,926)
CAM0_CN: P1.144
CAM0_CP: P1.142
CAM0_DN0: P1.138
CAM0_DN1: P1.150
CAM0_DP0: P1.136
CAM0_DP1: P1.148
CAM1_CN: P1.149
CAM1_CP: P1.147
CAM1_DN0: P1.161
CAM1_DN1: P1.155
CAM1_DN2: P1.143
CAM1_DN3: P1.137
CAM1_DP0: P1.159
CAM1_DP1: P1.153
CAM1_DP2: P1.141
CAM1_DP3: P1.135
CH_GND: D2.3 P1.154 P1.156 P1.158 U2.2 | length 2065.1
  TopLayer w10: U2.2 2214.4,790 v1(2266,790) ; v1(2236,312) 2297.4,312 D2.3
  BottomLayer w10: P1.154 2033.46,239.46 2054,260 ; P1.156 2057.09,256.91 2054,260 ; P1.158 2080.71,252.71 2108.13,280.13 ; v1(2236,312) 2235.94,312.06 2193.06,312.06 ; v1(2266,790) 2505,790 2567,728 2567,364 2547,344 2225,344 2193.06,312.06 ; 2054,260 2074.13,280.13 2108.13,280.13 ; 2108.13,280.13 2161.13,280.13 2193.06,312.06
DS1_DN1: P1.120
DSI0_CN: P1.105
DSI0_CP: P1.107
DSI0_DN0: P1.99
DSI0_DN1: P1.93
DSI0_DP0: P1.101
DSI0_DP1: P1.95
DSI1_CN: P1.102
DSI1_CP: P1.100
DSI1_DN0: P1.96
DSI1_DN2: P1.114
DSI1_DN3: P1.108
DSI1_DP0: P1.94
DSI1_DP1: P1.118
DSI1_DP2: P1.112
DSI1_DP3: P1.106
EMMC_DISABLE_N: P1.2@96.46,55.12
EMMC_EN_N_1V8: P1.90 U1.62 | length 437.4
  TopLayer w10: v1(1475,279) 1475.32,279.32 U1.62
  BottomLayer w10: P1.90 1277.56,158.14 1283.42,164 1363,164 v1@1476.5,277.5
GND: C1.2 C2.2 C3.2 C4.2 C5.2 C6.2 C7.2 C8.1 C9.1 C10.2 C11.1 C12.1 C13.1 C14.1 D1.1 D2.1 D2.2 J1.4 J1.6 J1.8 J1.10 J1.12 P1.1@84.65,55.12 P1.5@2244,900 P1.6@2458.96,900 P1.7 P1.8 P1.13 P1.14 P1.19 P1.20 P1.25 P1.26 P1.31 P1.32 P1.37 P1.38 P1.43 P1.44 P1.49 P1.50 P1.55 P1.56 P1.61 P1.62 P1.67 P1.68 P1.73 P1.74 P1.79 P1.80 P1.85 P1.86 P1.91 P1.92 P1.97 P1.98 P1.103 P1.104 P1.109 P1.110 P1.115 P1.116 P1.121 P1.122 P1.127 P1.133 P1.134 P1.139 P1.140 P1.145 P1.146 P1.151 P1.152 P1.157 P1.163 P1.164 P1.169 P1.170 P1.181 P1.182 P1.187 P1.188 P1.195 P1.196 SW1.3 SW1.4 U1.10 U1.20 U1.27 U1.74 X1.2 X1.4 | length 9035.8
  TopLayer w10: P1.13 227,55.74 227,187.29 229,189.29 v1(229,192) ; P1.19 297.24,187.54 301,191.29 v1(301,194) ; D1.1 418.04,853.53 454.68,890.17 454.68,902.78 477.18,925.28 SW1.4 493.98,925.28 516.48,902.78 516.48,888.64 562.87,842.24 563.66,842.24 570.87,835.04 C7.2 C6.2 C5.2 C4.2 C3.2 ; P1.25 368.11,194.11 v1(370,196) ; P1.31 438.98,162.98 475.54,199.54 v1(476,199.54) 477.46,198.09 488.91,198.09 509.84,177.16 P1.37 ; P1.43 722.44,187.44 v1(739,204) ; SW1.3 957.17,925.28 ; v1(864,208) 864.17,207.83 P1.55 ; v1(978,397) 1054.68,397 1064.68,407.01 1064.68,407.8 1071.89,415 C13.1 ; C9.1 1016.14,985.04 1008.15,977.05 1008.15,976.26 957.17,925.28 ; C3.2@1062.99,833.98 C3.2 ; C3.2@1062.99,835.04 1055.79,842.24 1055,842.24 971.96,925.28 957.17,925.28 ; v1(1086,919) 1118.46,886.54 1133.54,886.54 ; C2.2 1162.32,380 v1(1196,380) ; U1.27 1133.54,886.54 ; v1(1314,1085) 1339.96,1059.04 1353.63,1059.04 C12.1 1357.2,1049.88 U1.20 ; P1.103 1431.1,172.1 v1(1442,183) ; v1(1501,185) 1501.97,184.03 P1.109 ; U1.10 1554.06,1013.06 1563,1022 v1(1603,1022) ; C10.2 1627.94,1111.54 1680.03,1059.46 1683.97,1059.46 1697.67,1073.16 1697.67,1073.75 1703.53,1079.61 X1.2 1823.27,1068.86 1830.14,1068.86 1850,1049 1851,1049 1858.86,1041.14 1866.73,1041.14 X1.4 1878.87,1029 v1(1935,1029) ; P1.115 1572.83,186.83 v1(1573,187) 1586,200 1616,200 1643.7,172.3 P1.121 ; U1.74 1712.44,363.98 1712.44,323.56 1738,298 1859.19,298 1867.85,306.65 ; C14.1 1867.85,269.47 1867.85,306.65 ; J1.10 J1.12 1940,380.06 1925.31,365.38 1915.86,365.38 1910,359.52 v1(1910,330) 1871.32,330 C1.2 1867.85,326.53 1867.85,306.65 ; v1(2143,317) 2143,319.71 2140,322.71 J1.8 J1.6 J1.4 ; v1(2159,865) 2184,865 2199,880 2219,900 P1.6@2458.96,900 ; P1.169 2210.63,179.63 v1(2222,191) 2223.91,192.91 2234.72,192.91 2262.69,220.88 2266.63,220.88 2275.41,229.66 D2.1 ; D2.2 2326.59,229.66 2335.37,220.88 2339.31,220.88 2363.28,196.91 2366.09,196.91 v1(2368,195) 2352.36,179.36 P1.181 ; v1(2422,196) 2423.23,194.77 P1.187 ; v1(2516,198) 2516,56.83 P1.195 ; C3.2 1066.08,837.34 1084.34,837.34 1133.54,886.54
  BottomLayer w10: P1.8 167.32,174.32 168,175 ; v1@230.91,187.61 230.91,187.38 238.19,180.11 P1.14 ; v1(301,194) 301,191.29 309.06,183.24 P1.20 ; v1(370,196) 370,195.06 379.92,185.14 P1.26 ; P1.32 450.79,171.79 451,172 ; P1.38 521.65,172.65 522,173 ; P1.44 734.25,196.55 739,201.29 v1(739,204) ; P1.50 805.12,167.12 814,176 ; v1(864,208) 875.98,196.02 P1.56 ; 946,174 946.85,173.15 P1.62 ; P1.68 1017.72,167.72 1027,177 ; 1088,174 1088.58,173.42 P1.74 ; P1.80 1159.45,158.45 1174.94,173.94 ; 1229,172 1230.32,170.68 P1.86 ; v1(1442,183) 1442,190.29 1442.91,189.38 P1.104 ; v1(1501,185) 1513.78,172.22 P1.110 ; v1(1573,187) 1584.65,175.35 P1.116 ; P1.122 1655.51,169.51 1656,170 ; P1.134 1797.24,169.24 1798,170 ; 1868,176 1868.11,175.89 P1.140 ; 1938,180 1938.98,179.02 P1.146 ; v1(2222,191) 2222.44,190.56 P1.170 ; P1.182 2364.17,188.47 2368,192.29 v1(2368,195) ; v1(2422,196) 2423.22,194.78 2423.22,181.86 2435.04,170.04 P1.188 ; v1(2516,198) 2529.53,184.47 P1.196
GPIO0: P1.3@108.27,55.12 U1.93 | length 2319.7
  TopLayer w10: P1.3@108.27,55.12 108.27,200.27 158,250 v1(158,252) ; U1.93 1860.87,768.43 1864.29,765 v1(1867,765)
  BottomLayer w10: v1(158,252) 445,252 524,331 543,331 692,480 768,480 862,574 862,616 867,621 1842,621 1884,663 1884,754.93 1875.84,763.09 1868.91,763.09 v1(1867,765)
GPIO1: P1.5@131.89,55.12 U1.92 | length 2318.3
  TopLayer w10: P1.5@131.89,55.12 131.89,185.89 143,197 v1(144,197) ; U1.92 1800.38,749 1841,749 1855,735 v1(1906,735)
  BottomLayer w10: v1(144,197) 145.18,198.18 145.18,211.18 168,234 452,234 525,307 543,307 687.5,451.5 768.5,451.5 889,572 889,595.14 894.86,601 1847,601 1917,671 1917,724 v1(1906,735)
GPIO2: P1.9 TP3.1 U1.34 | length 1557.8
  TopLayer w10: P1.9 179.13,317.13 506,644 ; TP3.1@407,641 TP3.1 506,644 ; U1.34 610.74,748.74 506,644
GPIO3: P1.11 TP4.1 U1.35 | length 1648.3
  TopLayer w10: P1.11 206.61,58.98 206.61,101.17 206.69,101.25 206.69,275.69 433.85,502.85 ; TP4.1 250,635.19 265.18,620.01 265.18,619.82 347,538 v1(347,537) ; v1(397,501) 398.85,502.85 433.85,502.85 ; U1.35@1189.88,730 661,730 433.85,502.85
  BottomLayer w10: v1(347,537) 348,537 384,501 v1(397,501)
GPIO4: P1.15 U1.36 | length 1347.1
  TopLayer w10: P1.15 252.49,57.61 252.49,286.49 678,712 738,712 1165.4,712 1167.13,710.28 1188.98,710.28 U1.36
GPIO5: P1.17 U1.38 | length 1300.1
  TopLayer w10: P1.17 275.59,57.09 275.59,277.59 665,667 1165.4,667 1167.5,669.09 1188.98,669.09 U1.38
GPIO6: P1.21 U1.39 | length 1254.2
  TopLayer w10: P1.21 324.72,58.98 324.72,101.17 324.8,101.25 324.8,295.8 679.32,650.32 U1.39
GPIO7: P1.23 U1.40 | length 1217.6
  TopLayer w10: P1.23 344.49,283.49 691.63,630.63 U1.40
GPIO8: P1.27 U1.41 | length 1169.9
  TopLayer w10: P1.27 393.7,57.09 393.7,298.7 705.94,610.94 U1.41
GPIO9: P1.29 U1.42 | length 1134.9
  TopLayer w10: P1.29 413.39,57.09 413.39,286.39 718.26,591.26 U1.42
GPIO10: P1.33
GPIO11: P1.35
GPIO12: P1.45
GPIO13: P1.47 U1.43 | length 850.6
  TopLayer w10: P1.47 770,55.43 770,425 916.57,571.57 U1.43
GPIO14: P1.51 U1.47 | length 742.8
  TopLayer w10: P1.51 816.93,376.93 915,475 1135,475 1152.83,492.83 U1.47
GPIO15: P1.53 U1.48 | length 707.3
  TopLayer w10: P1.53 840.55,370.55 920,450 1135,450 1158.15,473.15 U1.48
GPIO16: P1.57 U1.45 | length 732.7
  TopLayer w10: P1.57 887.8,377.8 v1(935,425) ; v1(1005,525) 1007.71,525 1014.91,532.2 U1.45
  BottomLayer w10: v1(935,425) 935,500 960,525 v1(1005,525)
GPIO17: P1.59 U1.46 | length 688.4
  TopLayer w10: P1.59 911.42,366.42 965,420 v1(1010,420) ; v1(1100,505) 1107.52,512.52 U1.46
  BottomLayer w10: v1(1010,420) 1010,485 1030,505 v1(1100,505)
GPIO18: P1.63 U1.55 | length 650.3
  TopLayer w10: P1.63 958.66,261.14 964.52,267 1278,267 1337.52,326.52 U1.55
GPIO19: P1.65 U1.56 | length 606.8
  TopLayer w10: P1.65 983.27,56.1 983.27,192.27 1043,252 1285,252 1357.2,324.2 U1.56
GPIO20: P1.69
GPIO21: P1.71
GPIO22: P1.75
GPIO23: P1.77
GPIO24: P1.81 U1.60 | length 491.5
  TopLayer w10: P1.81 1172.36,56.22 1172.36,168.36 1196,192 1319,192 1435.34,308.34 1435.34,364.28 U1.60
GPIO25: P1.83
GPIO26: P1.87 U1.61 | length 445.7
  TopLayer w10: P1.87 1242.13,171.14 1247.98,177 1329,177 1455.63,303.63 U1.61
GPIO27: P1.89
GPIO28: P1.28
GPIO29: P1.30
GPIO30: P1.34
GPIO31: P1.36
GPIO32: P1.46
GPIO33: P1.48 U1.44 | length 808.3
  TopLayer w10: v1(795,205) 795,400 946.89,551.89 U1.44
  BottomLayer w10: P1.48 781.5,166.5 795,180 v1(795,205)
GPIO34: P1.52
GPIO35: P1.54
GPIO36: P1.58 U1.51 | length 641.9
  TopLayer w10: v1(1199,343) 1200.91,344.91 1207.91,344.91 1227.88,364.88 U1.51
  BottomLayer w10: P1.58 900,55.51 900,319.14 923.86,343 v1(1199,343)
GPIO37: P1.60 U1.53 | length 669
  TopLayer w10: v1(1012,319) 1031,319 1053,297 1262,297 1298.15,333.15 U1.53
  BottomLayer w10: P1.60 925,56.89 925,277 967,319 v1(1012,319)
GPIO38: P1.64 U1.54 | length 643.9
  TopLayer w10: v1(980,296) 994,282 1271,282 1317.83,328.83 U1.54
  BottomLayer w10: P1.64 970.47,202.47 980,212 v1(980,296)
GPIO39: P1.66 U1.52 | length 539.5
  TopLayer w10: v1@1092,315.71 v1(1092,318) 1258,318 1277.56,337.56 1277.56,363.98 U1.52
  BottomLayer w10: P1.66 994.09,177.09 1065,248 1065,312.14 1070.86,318 v1(1092,318)
GPIO40: P1.70
GPIO41: P1.72 U1.57 | length 550.3
  TopLayer w10: v1(1065,193.5) 1065,200 1102,237 1292,237 1376.28,321.28 1376.28,364.28 U1.57
  BottomLayer w10: P1.72 1065,55.16 v1(1065,193.5)
GPIO42: P1.76 U1.58 | length 521.4
  TopLayer w10: v1(1116,194) 1144,222 1300,222 1395.97,317.97 1395.97,364.28 U1.58
  BottomLayer w10: P1.76 1115,57.91 1112,60.91 1116,64.91 v1(1116,194)
GPIO43: P1.78 U1.59 | length 505.3
  TopLayer w10: v1(1160,192.91) 1174.09,207 1309,207 1416.26,314.26 U1.59
  BottomLayer w10: P1.78 1135.83,169.83 v1@1159.46,193.46
GPIO44: P1.82
GPIO45: P1.84
HDMI_CEC: P1.171
HDMI_CLK_N: P1.111
HDMI_CLK_P: P1.113
HDMI_DN0: P1.117
HDMI_DN1: P1.123
HDMI_DN2: P1.129
HDMI_DP0: P1.119
HDMI_DP1: P1.125
HDMI_DP2: P1.131
HDMI_HPD_N_1V8: P1.88
HDMI_SCL: P1.175
HDMI_SDA: P1.173
NetC10_1: C10.1 TP1.1 U1.12 X1.3 | length 557.8
  TopLayer w10: U1.12 1515.59,976.02 1515.59,1004.05 1550.33,1038.79 1550.33,1040.76 1564.03,1054.46 C10.1 1620.54,1054.46 1644,1031 1811.91,1031 X1.3 1814.49,1030.39 1825.24,1019.65 1825.24,1017.68 1891.91,951 TP1.1
NetC11_2: C11.2 R1.2 TP2.1 X1.1 | length 616.2
  TopLayer w10: R1.2 1507.33,1131.81 1522.81,1131.81 1542,1151 1647.54,1151 1666.33,1132.21 1666.33,1130.24 1680.03,1116.54 1682,1116.54 1690.46,1125 1850,1125 1870.5,1104.5 1870.5,1086.58 X1.1 2036.61,1079.61 TP2.1
NetC12_2: C12.2 SW1.1 SW1.2 U1.14 | length 1072.6
  TopLayer w10: SW1.2 SW1.1 964.48,1102.28 984.25,1122.05 1326.06,1122.05 C12.2@1352.8,1095.32 ; C12.2@1352.01,1095.32 C12.2@1352.8,1095.32 ; U1.14 1474.41,976.02 1474.41,1004.59 1392,1087 1360.32,1087 C12.2 1360,1088.11 C12.2@1352.8,1095.32
NetC13_2: C13.2 U1.49 | length 99.2
  TopLayer w10: C13.2 1112.69,420.37 1128.37,420.37 1161,453 1187.61,453 1188.98,454.37 U1.49
NetC14_2: C14.2 U1.73 | length 208.8
  TopLayer w10: U1.73 1691.85,317.15 1736,273 C14.2@1834.68,273
NetD1_2: D1.2 R3.2 | length 102
  TopLayer w10: D1.2 322.53,796 R3.2
NetR1_1: R1.1 U1.13 | length 78.2
  TopLayer w10: R1.1 1495,1050.52 U1.13
RUN: P1.177
TVDAC: P1.166
USB_DM: P1.167 U1.70 | length 854.2
  TopLayer w10: U1.70 1632.8,242.2 1667,208 v1(2136,208) ; P1.167 2187,197.14 2189.09,199.23 2189.09,206.09 v1(2191,208)
  BottomLayer w10: v1(2136,208) v1(2191,208) v1@2187.77,204.77
USB_DP: P1.165 U1.71 | length 850.3
  TopLayer w10: U1.71 1652.48,247.52 1672,228 2094,228 2126,260 2154,260 2165,249 2165,56.73 P1.165
USB_OTGID: P1.168 U1.69 | length 859.9
  TopLayer w10: U1.69 1613.11,231.89 1664,181 v1@2104,181
  BottomLayer w10: v1(2112,181) 2110.71,181 2111.71,182 2194.14,182 2200,176.14 2200,56.3 P1.168
VBAT: P1.197 P1.198 P1.199 P1.200
VC_TCK: J1.9 U1.76 U2.5 | length 619.7
  TopLayer w10: U1.76 1801.02,434.68 1846.68,434.68 1942,530 2020.18,530 2026.04,535.86 2026.04,620.04 J1.9 2075.14,634 2084.14,643 v1(2086,643) ; v1(2099,788) 2100,789 U2.5
  BottomLayer w10: v1(2086,643) 2086,644.86 2077,653.86 2077,766 v1(2099,788)
VC_TDI: J1.5 U1.77 U2.1 | length 801.2
  TopLayer w10: U1.77 1833.46,453.46 1855,475 v1(1855,517) ; v1(2185,517) 2185,517.86 2195,527.86 2195,589 J1.5 2277.14,634 2286.14,643 v1(2288,643) ; U2.1 2240.59,763.41 v1(2259,745)
  BottomLayer w10: v1(1855,517) 1920.67,517 1928.67,509 2172,509 2180,517 v1(2185,517) ; v1(2259,745) 2278,726 2278,653.86 2288,643.86 v1(2288,643)
VC_TDO: J1.11 U1.89 U2.4 | length 492.7
  TopLayer w10: U1.89 1884.32,689.68 1911.17,662.83 1925.31,662.83 1940,648.14 J1.11 1978,634 v1(1989,645) ; v1(2076,814) 2076.59,814.59 U2.4
  BottomLayer w10: v1(1989,645) 1989,727 v1(2076,814)
VC_TMS: J1.7 U1.72 U2.6 | length 1151.5
  TopLayer w10: U1.72 1672.17,262.83 1692,243 1996,243 2089,336 2089,583 2111.17,605.17 2125.31,605.17 2140,619.86 J1.7 2174.52,634 2182.52,642 v1(2185,642) ; v1(2105,736) 2129.54,760.54 2135.72,760.54 U2.6
  BottomLayer w10: v1(2105,736) 2106.86,736 2115.86,727 2179,727 2185,721 v1(2185,642)
VC_TRST_N: J1.3 U1.90 U2.3 | length 868.1
  TopLayer w10: U1.90 1800.75,710 2330,710 ; U2.3 2287.41,814.59 2296,806 2296,744 2330,710 ; J1.3@2325.31,689.1 2340,674.42 J1.3 ; J1.3@2341,634 2341,699 2330,710
VDAC: P1.189 P1.190
VDD: C1.1 C2.1 C3.1 C4.1 C5.1 C6.1 C7.1 FB1.1 J1.1 J1.2 P1.39 P1.40 P1.41 P1.42 R2.1 R3.1 U1.11 U1.19 U1.28 U1.50 U1.75 U1.100 | length 7537.2
  TopLayer w10: R3.1 473.23,799.61 C7.1 C6.1 C5.1 C4.1 C3.1 ; P1.39 533.46,361.46 698.82,526.82 ; P1.41 698.82,420 ; v1(722,398) 700,420 698.82,420 ; v1(814,569) 797,552 724,552 698.82,526.82 ; v1(888,770) 1033.39,770 1055,791.61 1055.79,791.61 1062.99,798.82 C3.1 ; v1(1045,373) 1120.8,373 1129,381.2 1129,390 1171.26,432.26 1171.26,432.87 1172.17,433.78 U1.50 1709.22,433.78 1731.22,411.78 U1.75 1764.1,332 1830.68,332 C1.1 ; FB1.1 1203.03,964.82 1301,866.85 ; U1.19 1376.89,901.89 ; U1.11 1534.37,924.61 1528.51,918.75 1528.51,916 ; U1.100 1782.4,906.22 1781.5,907.13 1781.5,910.14 1775.64,916 1528.51,916 ; v1(2240,533) 2409,533 2440,564 ; J1.1 2440,592.66 2440,564 ; R2.1 2466.48,298 2450,298 2440,308 J1.2 2440,564 ; 698.82,420 698.82,526.82 ; C3.1 1063.72,800.34 1084.34,800.34 1150.85,866.85 U1.28 1301,866.85 ; 1301,866.85 1341.85,866.85 1376.89,901.89 ; 1376.89,901.89 1377.89,901.89 1392,916 1528.51,916
  BottomLayer w10: P1.40 545.28,226.28 679,360 732,360 ; P1.42 710.63,330.63 740,360 ; v1(722,398) 737.5,382.5 754.5,382.5 ; v1(814,569) 814,756 828,770 v1(888,770) ; v1(1045,373) 1044.5,372.5 987.5,372.5 975,360 740,360 ; v1(2240,533) 2221,552 1869,552 1861,560 932,560 754.5,382.5 ; 732,360 754.5,382.5 ; 732,360 740,360
VDDA: C8.2 C9.2 FB1.2 U1.21 U1.22 | length 493.8
  TopLayer w10: C8.2 C9.2 1146.73,1072.83 FB1.2@1156.69,1062.87 ; FB1.2 1283.82,1067.18 1317.83,1033.17 ; U1.22 1317.83,1033.17 ; U1.21 1337.52,1013.48 1317.83,1033.17
pads on no net: P1.4@120.08,55.12 P1.6@143.7,55.12 P1.10 P1.12 P1.16 P1.18 P1.22 P1.24 P1.124 P1.126 P1.128 P1.130 P1.132 P1.160 P1.162 P1.172 P1.174 P1.176 P1.178 P1.179 P1.180 U1.1 U1.2 U1.3 U1.4 U1.5 U1.7 U1.8 U1.9 U1.15 U1.16 U1.17 U1.18 U1.23 U1.24 U1.25 U1.26 U1.29 U1.30 U1.31 U1.32 U1.33 U1.63 U1.64 U1.65 U1.66 U1.67 U1.68 U1.78 U1.79 U1.80 U1.81 U1.82 U1.83 U1.84 U1.85 U1.86 U1.87 U1.88 U1.91 U1.95 U1.96 U1.97 U1.98 U1.99
copper on no net: | length 2.4
  BottomLayer w10: 2245,56.18 2246.06,55.12 ; 2269.68,55.12 2270,55.43 ; 2293,55.43 2293.31,55.12

## Polygon pours and split planes (outlines as drawn)
no net on TopLayer "NONET_L01_P000" (solid, pour order 0): 131,1160
GND on BottomLayer "GND_L02_P003" (solid, pour order 3): 126,1161 126,171 131,166 2535,166 2535,1164.02
no net on BottomLayer "NONET_L02_P002" (solid, pour order 2): 134,1164

## Keep-outs
TopLayer:
  region: 2582.68,786.9 ccw(c2660.32,786.9) 2605.42,732 2605.66,731.76 ccw(c2661.42,787.51) 2661.42,708.66 2661.42,0 2622.05,0 2622.05,551.18 2582.68,551.18
  region: 78.74,786.9 cw(c1.1,786.9) 56,732 55.76,731.76 cw(c0,787.51) 0,708.66 0,0 39.37,0 39.37,551.18 78.74,551.18
BottomLayer:
  region: 2582.68,786.9 ccw(c2660.32,786.9) 2605.42,732 2605.66,731.76 ccw(c2661.42,787.51) 2661.42,708.66 2661.42,0 2622.05,0 2622.05,551.18 2582.68,551.18
  region: 78.74,786.9 cw(c1.1,786.9) 56,732 55.76,731.76 cw(c0,787.51) 0,708.66 0,0 39.37,0 39.37,551.18 78.74,551.18

## Silkscreen, mask and mechanical layers (free items; w line width, h text height)
TopOverlay:
  text "STM32 CM / RPL 2020 / Aidan Dougherty" at 31,1052 h20
TopSolder:
  region: -9.84,-9.84 -9.84,110.24 2671.26,110.24 2671.26,-9.84
BottomSolder:
  region: -9.84,-9.84 -9.84,110.24 2671.26,110.24 2671.26,-9.84
JEDEC Outline:
  the board outline again, w7.87
JEDEC Notes:
  text "- Nominal values used, all dimensions are mm." at 3149.61,334.65 h60
  text "- MH1 and MH2 are optional holes (200PIN_SODIMM_MO-224E, Page 1)" at 3149.61,285.43 h60
  text "- Non-metalized areas in 200PIN_SODIMM_MO-224E implemented as keepout / plane region objects." at 3149.61,236.22 h60
  text "- Component height rule derived from 200PIN_SODIMM_MO-224E, Page 3, \"Component Height Constraint\"." at 3149.61,187.01 h60
  text "- Pinout nets were derived from PC2700 DDR SDRAM Unbuffered SO-DIMM REFERENCENCE DESIGN SPECIFICATION (SODIMMDesignStand_rev1.PDF)" at 3149.61,137.8 h60
  text "- Component placement area arcs are approximated." at 3149.61,88.58 h60
  text "- Stackup and Plane pullback is not specified in 200PIN_SODIMM_MO-224E, nor implemented in this template." at 3149.61,39.37 h60
JEDEC Component Area (Approx):
  lines w7.87: 78.62,875.55 cw(c0,787.4) 118.11,787.4 118.11,157.48 568.9,157.48 568.9,165.35 726.38,165.35 726.38,157.48 2543.31,157.48 2543.39,787.4 ; 78.74,875.69 78.74,1181.1 2726.38,1181.1 2726.38,1018.85 2582.68,875.15 ; 2543.39,783.03 cw(c2661.42,787.4) 2582.36,875.15

## Dimensions
0,1181.1 to 2661.42,1181.1 on JEDEC Dimensions
2661.42,1181.1 to 2661.42,0 on JEDEC Dimensions
2661.42,0 to 2582.68,787.4 on JEDEC Dimensions
533.46,60.04 to 639.76,157.48 on JEDEC Dimensions

## Text inside footprints (layer, text, board x,y; h text height)
J1: TopOverlay "1" at 2492.36,685.18 h40 r180; TopOverlay "2" at 2504.17,409.59 h40 r180; TopOverlay "11" at 1899.45,685.18 h40 r180; TopOverlay "12" at 1899.45,409.59 h40 r180